# EAGLE board Compute v0.5 (EAGLE 7.3.2), part 1 of 2
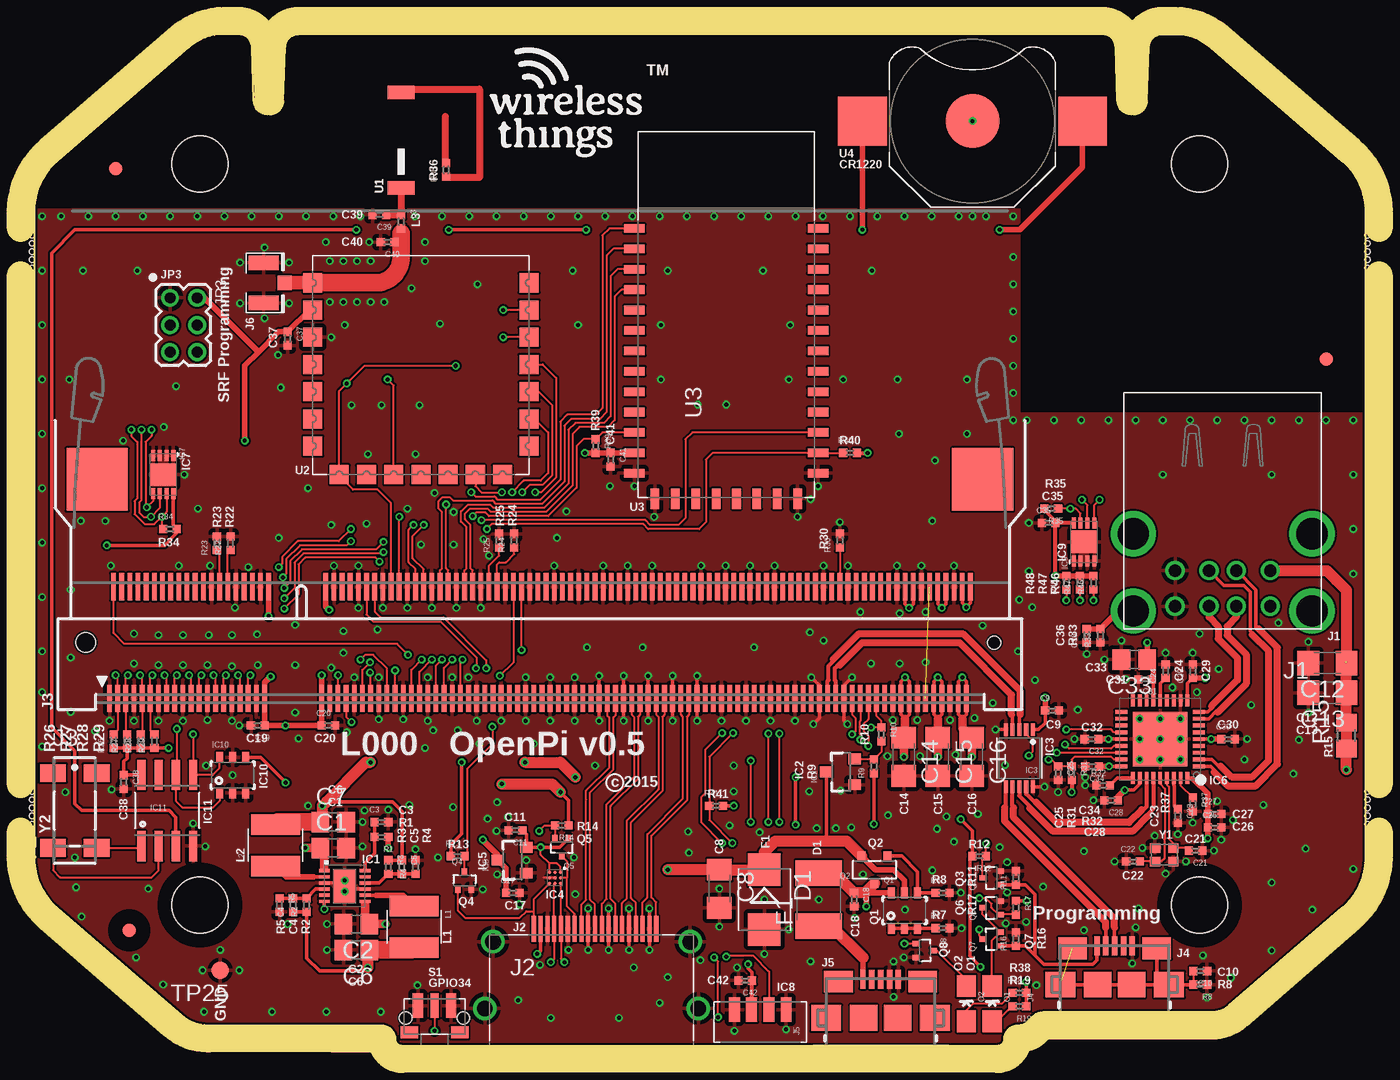
[diagram p0: board, top side]
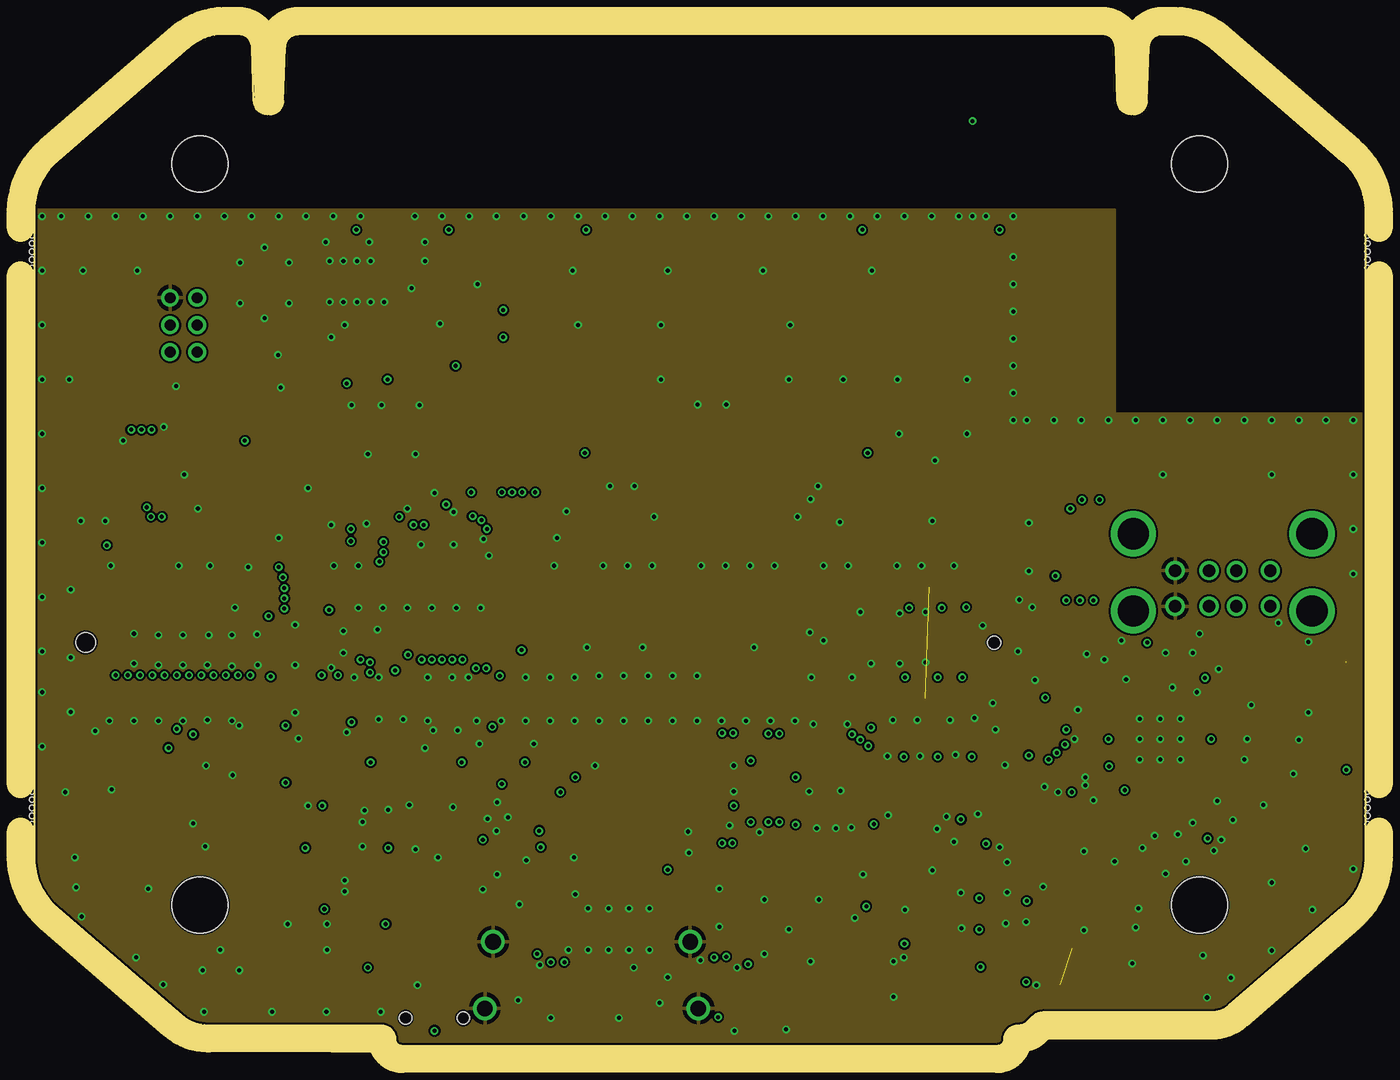
[diagram p1: board, inner layer Route2]
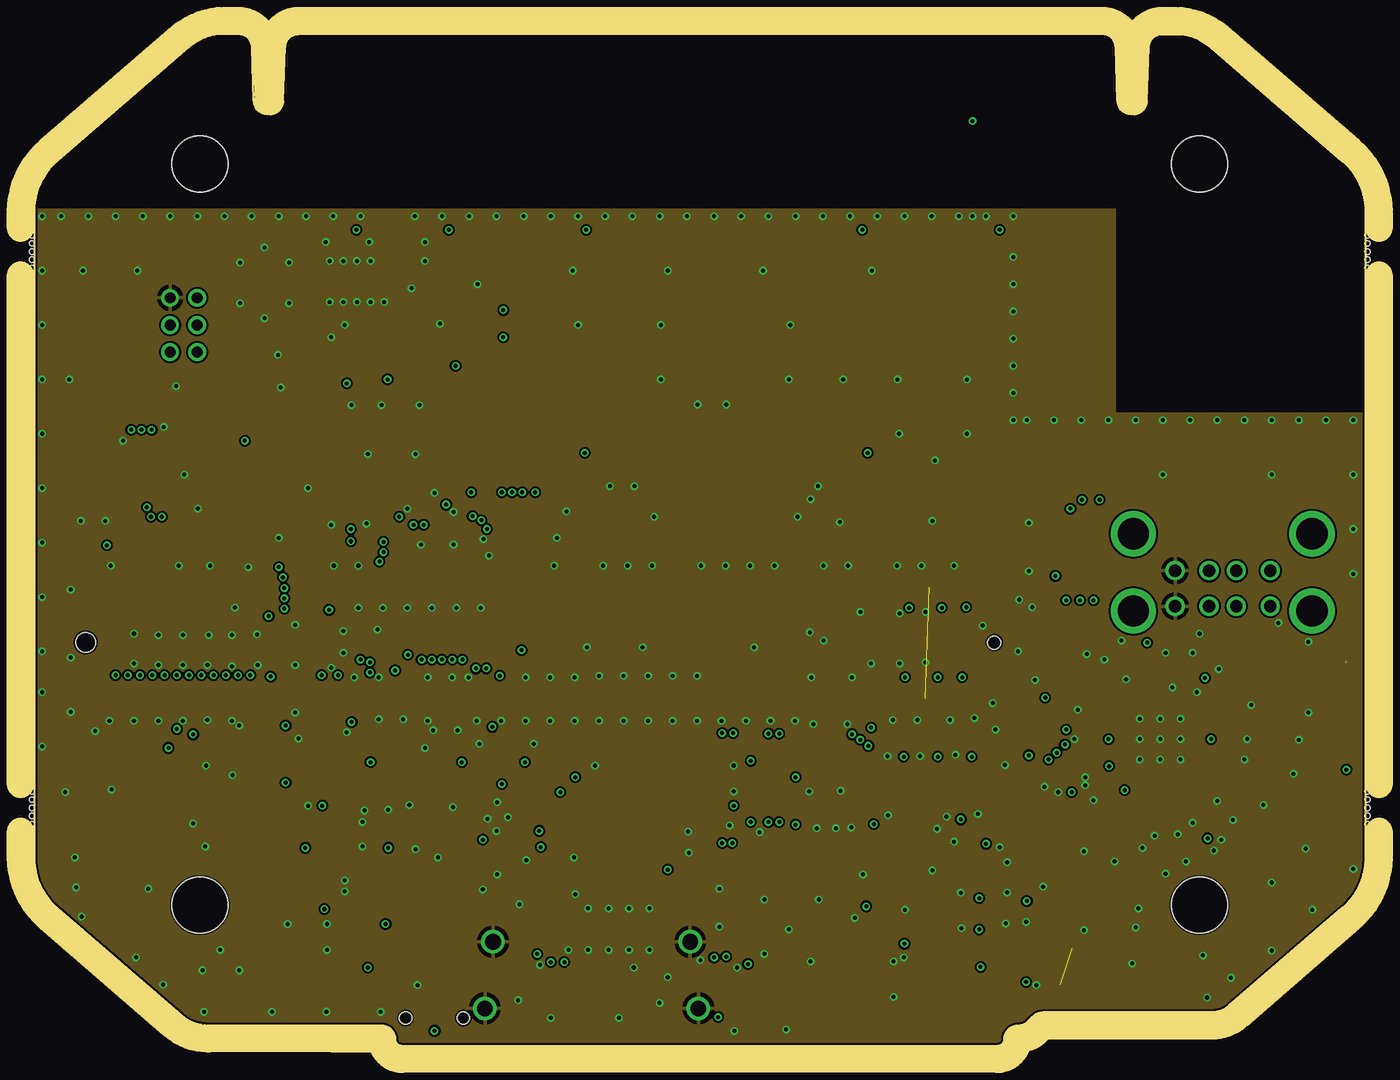
[diagram p2: board, inner layer Route15]
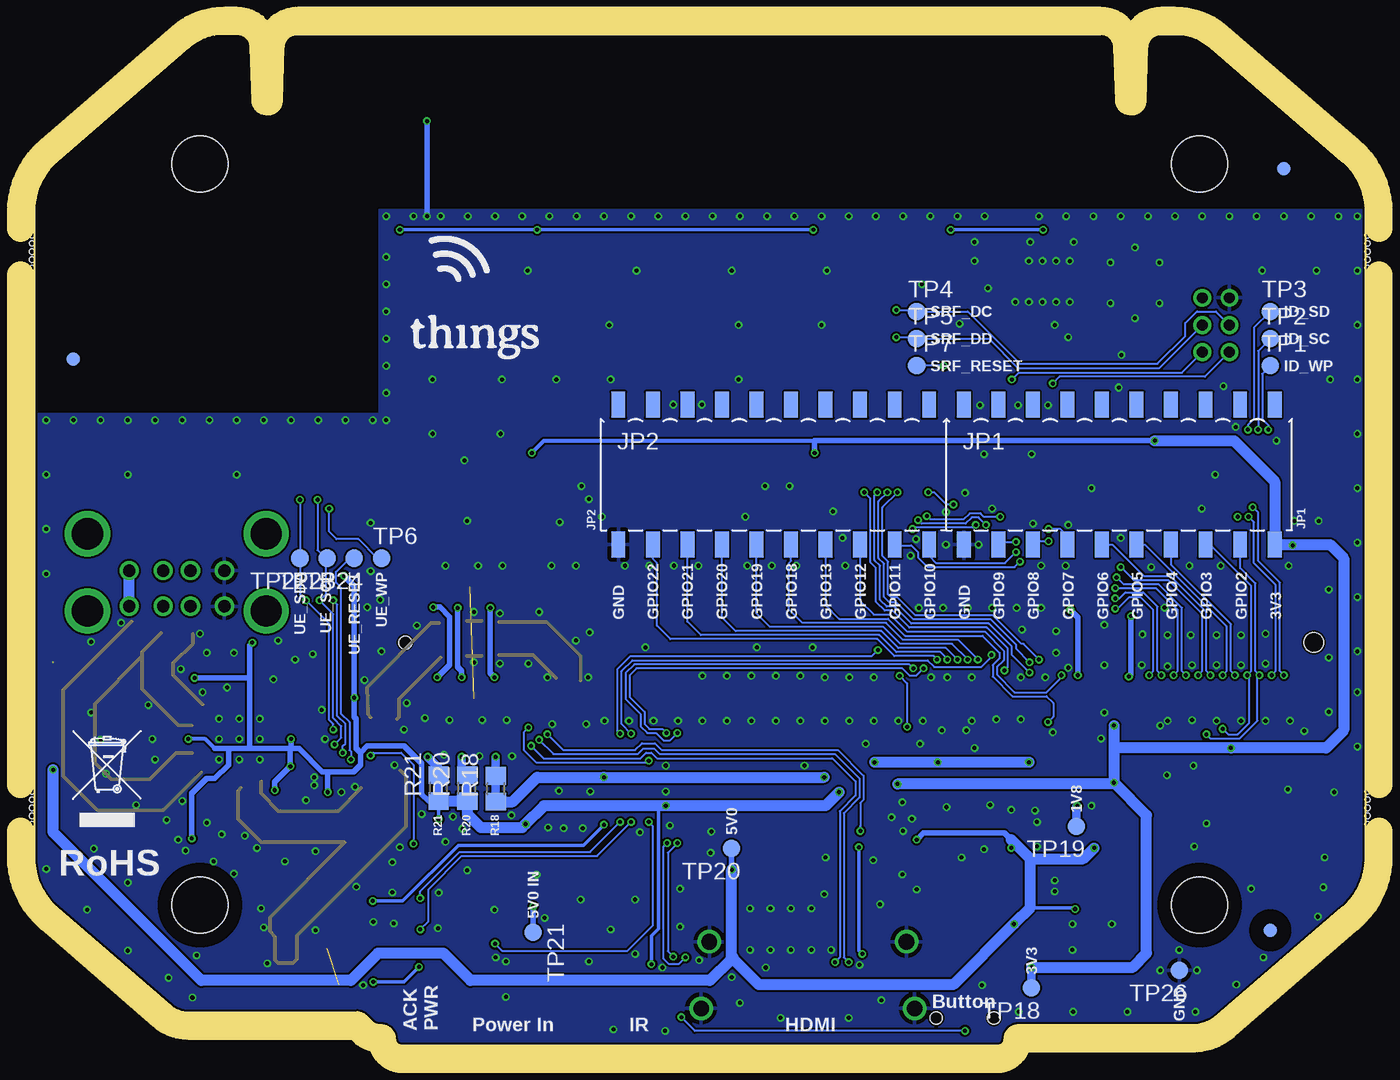
[diagram p3: board, bottom side, seen from below]

Size 97.9 x 74.4 mm. Coordinates in mm from the lower left corner, seen from the top.
Copper layers (1+2*15+16): Top 0.035mm / dielectric 0.17mm / Route2 0.018mm / dielectric 47mil / Route15 0.018mm / dielectric 0.17mm / Bottom 0.035mm
Design rules "little015mm  Round *": minimum track width 0.15mm, minimum drill 0.3mm, track to track 0.15mm, track to pad 0.15mm, pad to pad 0.15mm, via to via 0.15mm, smd to smd 0.15mm, copper to edge 0.15mm, drill to drill 0.15mm, minimum pad ring 10mil, minimum via ring 5mil, stop-mask expansion 4mil, vias tented up to drill 0.6mm, thermal gap 12mil
Net classes: 0 default: width 0.15 mm, drill 0.3 mm; 1 ANT: width 1.27 mm, drill 0.4 mm, clearance 0.4 mm; 2 90R: width 0.5 mm, drill 0.3 mm, clearance 0.7 mm to class 0, clearance 0.1 mm; 3 100R: width 0.15 mm, drill 0.3 mm, clearance 0.6 mm to class 2, clearance 0.4 mm; 4 5V0: width 0.406 mm, drill 0.3 mm, clearance 0.6 mm to class 2, clearance 0.6 mm to class 3; 5 3V3: width 0.254 mm, drill 0.3 mm, clearance 0.6 mm to class 2, clearance 0.6 mm to class 3; 6 1V8: width 0.254 mm, drill 0.3 mm, clearance 0.6 mm to class 2, clearance 0.6 mm to class 3; 7 H5V0: width 0.254 mm, drill 0.3 mm, clearance 0.6 mm to class 2, clearance 0.6 mm to class 3; 8 MAINS: clearance 4 mm to class 0, clearance 4 mm to class 1, clearance 4 mm to class 2, clearance 4 mm to class 3, clearance 4 mm to class 4, clearance 4 mm to class 5, clearance 4 mm to class 6, clearance 4 mm to class 7, clearance 4 mm
tRestrict: area 37.3,63.9 to 39.4,65.5
Milling: 1 lines

## Footprints (pad centres in the part's own frame; a part is rotated, then mirrored left to right if it is on the bottom)
C0805 = smd 1.3 x 1.5: 1 -0.95,0; 2 0.95,0
C0402-SMALLER = smd 0.6 x 0.6: 1 -0.5,0; 2 0.5,0
C1206 = smd 1.6 x 1.8: 1 -1.4,0; 2 1.4,0
SMB = smd 2.4 x 2.4: A 2.2,0; C -2.2,0
L1812 = smd 1.9 x 3.4: 1 -1.95,0; 2 1.95,0
FIDUCIAL-1X2.5-STOP = smd 1 x 1: 1 0,0
WDFB-12L = smd 0.25 x 0.8: 1 -1.125,-1.5; 2 -0.675,-1.5; 3 -0.225,-1.5; 4 0.225,-1.5; 5 0.675,-1.5; 6 1.125,-1.5; 7 1.125,1.5; 8 0.675,1.5; 9 0.225,1.5; 10 -0.225,1.5; 11 -0.675,1.5; 12 -1.125,1.5 | smd 2.5 x 1.7: PAD 0,0
SOT23-3 = smd 0.9 x 0.8: 1 1,-0.95; 2 1,0.95; 3 -1.1,0
MSOP-10 = smd 0.3 x 0.9: 1 -1,-2.1; 2 -0.5,-2.1; 3 0,-2.1; 4 0.5,-2.1; 5 1,-2.1; 6 1,2.1; 7 0.5,2.1; 8 0,2.1; 9 -0.5,2.1; 10 -1,2.1
WLSCP9 = smd 0.25 x 0.25: A1 -0.4,0.4; A2 0,0.4; A3 0.4,0.4; B1 -0.4,0; B2 0,0; B3 0.4,0; C1 -0.4,-0.4; C2 0,-0.4; C3 0.4,-0.4
QFN36-CENTRE-MASK = smd 0.28 x 0.9: 1 -2,-2.85; 2 -1.5,-2.85; 3 -1,-2.85; 4 -0.5,-2.85; 5 0,-2.85; 6 0.5,-2.85; 7 1,-2.85; 8 1.5,-2.85; 9 2,-2.85; 19 2,2.85; 20 1.5,2.85; 21 1,2.85; 22 0.5,2.85; 23 0,2.85; 24 -0.5,2.85; 25 -1,2.85; 26 -1.5,2.85; 27 -2,2.85 | smd 0.9 x 0.28: 10 2.85,-2; 11 2.85,-1.5; 12 2.85,-1; 13 2.85,-0.5; 14 2.85,0; 15 2.85,0.5; 16 2.85,1; 17 2.85,1.5; 18 2.85,2; 28 -2.85,2; 29 -2.85,1.5; 30 -2.85,1; 31 -2.85,0.5; 32 -2.85,0; 33 -2.85,-0.5; 34 -2.85,-1; 35 -2.85,-1.5; 36 -2.85,-2 | smd 4 x 4: PAD 0,0
TDFN-8 = smd 0.8 x 0.3: 1 -1.4,0.75; 2 -1.4,0.25; 3 -1.4,-0.25; 4 -1.4,-0.75; 5 1.4,-0.75; 6 1.4,-0.25; 7 1.4,0.25; 8 1.4,0.75 | smd 1.65 x 1.88: EP 0,0
TSOP75X = smd 0.8 x 1.8: 1 -1.905,-0.9; 2 -0.635,-0.9; 3 0.635,-0.9; 4 1.905,-0.9
SOT-23-6 = smd 0.51 x 0.8: 1 -0.95,-1.3; 2 0,-1.3; 3 0.95,-1.3; 4 0.95,1.3; 5 0,1.3; 6 -0.95,1.3
SO08 = smd 0.61 x 2.21: 1 -1.905,-2.616; 2 -0.635,-2.616; 3 0.635,-2.616; 4 1.905,-2.616; 5 1.905,2.616; 6 0.635,2.616; 7 -0.635,2.616; 8 -1.905,2.616
61400826021 = drill 2.3: 5 -6.57,5.68; 6 -6.57,0; 7 6.57,0; 8 6.57,5.68 | drill 0.9: A1 -3.5,5.33; A2 -1,5.33; A3 1,5.33; A4 3.5,5.33; B1 -3.5,2.71; B2 -1,2.71; B3 1,2.71; B4 3.5,2.71
10029449-001RLF = smd 0.3 x 1.9: 1 4.75,8.45; 2 4.25,8.45; 3 3.75,8.45; 4 3.25,8.45; 5 2.75,8.45; 6 2.25,8.45; 7 1.75,8.45; 8 1.25,8.45; 9 0.75,8.45; 10 0.25,8.45; 11 -0.25,8.45; 12 -0.75,8.45; 13 -1.25,8.45; 14 -1.75,8.45; 15 -2.25,8.45; 16 -2.75,8.45; 17 -3.25,8.45; 18 -3.75,8.45; 19 -4.25,8.45 | drill 1.15: GND@S1 -7.25,7.5; GND@S2 7.25,7.5; GND@S3 -7.85,2.6; GND@S4 7.85,2.6
1-1376408-4 = smd 0.35 x 2: 1 -32.65,-4.1; 2 -32.35,4.1; 3 -32.05,-4.1; 4 -31.75,4.1; 5 -31.45,-4.1; 6 -31.15,4.1; 7 -30.85,-4.1; 8 -30.55,4.1; 9 -30.25,-4.1; 10 -29.95,4.1; 11 -29.65,-4.1; 12 -29.35,4.1; 13 -29.05,-4.1; 14 -28.75,4.1; 15 -28.45,-4.1; 16 -28.15,4.1; 17 -27.85,-4.1; 18 -27.55,4.1; 19 -27.25,-4.1; 20 -26.95,4.1; 21 -26.65,-4.1; 22 -26.35,4.1; 23 -26.05,-4.1; 24 -25.75,4.1; 25 -25.45,-4.1; 26 -25.15,4.1; 27 -24.85,-4.1; 28 -24.55,4.1; 29 -24.25,-4.1; 30 -23.95,4.1; 31 -23.65,-4.1; 32 -23.35,4.1; 33 -23.05,-4.1; 34 -22.75,4.1; 35 -22.45,-4.1; 36 -22.15,4.1; 37 -21.85,-4.1; 38 -21.55,4.1; 39 -21.25,-4.1; 40 -20.95,4.1; 41 -17.05,-4.1; 42 -16.75,4.1; 43 -16.45,-4.1; 44 -16.15,4.1; 45 -15.85,-4.1; 46 -15.55,4.1; 47 -15.25,-4.1; 48 -14.95,4.1; 49 -14.65,-4.1; 50 -14.35,4.1; 51 -14.05,-4.1; 52 -13.75,4.1; 53 -13.45,-4.1; 54 -13.15,4.1; 55 -12.85,-4.1; 56 -12.55,4.1; 57 -12.25,-4.1; 58 -11.95,4.1; 59 -11.65,-4.1; 60 -11.35,4.1; 61 -11.05,-4.1; 62 -10.75,4.1; 63 -10.45,-4.1; 64 -10.15,4.1; 65 -9.85,-4.1; 66 -9.55,4.1; 67 -9.25,-4.1; 68 -8.95,4.1; 69 -8.65,-4.1; 70 -8.35,4.1; 71 -8.05,-4.1; 72 -7.75,4.1; 73 -7.45,-4.1; 74 -7.15,4.1; 75 -6.85,-4.1; 76 -6.55,4.1; 77 -6.25,-4.1; 78 -5.95,4.1; 79 -5.65,-4.1; 80 -5.35,4.1; 81 -5.05,-4.1; 82 -4.75,4.1; 83 -4.45,-4.1; 84 -4.15,4.1; 85 -3.85,-4.1; 86 -3.55,4.1; 87 -3.25,-4.1; 88 -2.95,4.1; 89 -2.65,-4.1; 90 -2.35,4.1; 91 -2.05,-4.1; 92 -1.75,4.1; 93 -1.45,-4.1; 94 -1.15,4.1; 95 -0.85,-4.1; 96 -0.55,4.1; 97 -0.25,-4.1; 98 0.05,4.1; 99 0.35,-4.1; 100 0.65,4.1; 101 0.95,-4.1; 102 1.25,4.1; 103 1.55,-4.1; 104 1.85,4.1; 105 2.15,-4.1; 106 2.45,4.1; 107 2.75,-4.1; 108 3.05,4.1; 109 3.35,-4.1; 110 3.65,4.1; 111 3.95,-4.1; 112 4.25,4.1; 113 4.55,-4.1; 114 4.85,4.1; 115 5.15,-4.1; 116 5.45,4.1; 117 5.75,-4.1; 118 6.05,4.1; 119 6.35,-4.1; 120 6.65,4.1; 121 6.95,-4.1; 122 7.25,4.1; 123 7.55,-4.1; 124 7.85,4.1; 125 8.15,-4.1; 126 8.45,4.1; 127 8.75,-4.1; 128 9.05,4.1; 129 9.35,-4.1; 130 9.65,4.1; 131 9.95,-4.1; 132 10.25,4.1; 133 10.55,-4.1; 134 10.85,4.1; 135 11.15,-4.1; 136 11.45,4.1; 137 11.75,-4.1; 138 12.05,4.1; 139 12.35,-4.1; 140 12.65,4.1; 141 12.95,-4.1; 142 13.25,4.1; 143 13.55,-4.1; 144 13.85,4.1; 145 14.15,-4.1; 146 14.45,4.1; 147 14.75,-4.1; 148 15.05,4.1; 149 15.35,-4.1; 150 15.65,4.1; 151 15.95,-4.1; 152 16.25,4.1; 153 16.55,-4.1; 154 16.85,4.1; 155 17.15,-4.1; 156 17.45,4.1; 157 17.75,-4.1; 158 18.05,4.1; 159 18.35,-4.1; 160 18.65,4.1; 161 18.95,-4.1; 162 19.25,4.1; 163 19.55,-4.1; 164 19.85,4.1; 165 20.15,-4.1; 166 20.45,4.1; 167 20.75,-4.1; 168 21.05,4.1; 169 21.35,-4.1; 170 21.65,4.1; 171 21.95,-4.1; 172 22.25,4.1; 173 22.55,-4.1; 174 22.85,4.1; 175 23.15,-4.1; 176 23.45,4.1; 177 23.75,-4.1; 178 24.05,4.1; 179 24.35,-4.1; 180 24.65,4.1; 181 24.95,-4.1; 182 25.25,4.1; 183 25.55,-4.1; 184 25.85,4.1; 185 26.15,-4.1; 186 26.45,4.1; 187 26.75,-4.1; 188 27.05,4.1; 189 27.35,-4.1; 190 27.65,4.1; 191 27.95,-4.1; 192 28.25,4.1; 193 28.55,-4.1; 194 28.85,4.1; 195 29.15,-4.1; 196 29.45,4.1; 197 29.75,-4.1; 198 30.05,4.1; 199 30.35,-4.1; 200 30.65,4.1 | smd 4.5 x 4.6: M1 -33.55,12; M2 31.55,12 | hole 1.45: -34.4,0 | hole 0.95: 32.4,0
USB-AB-MICRO-SMD_LWK = smd 1.4 x 0.4: D+ 2.85,0; D- 2.85,0.65; GND 2.85,-1.3; ID 2.85,-0.65; VBUS 2.85,1.3 | smd 1.6 x 2.1: SHIELD 2.675,3.1; SHIELD@5 2.675,-3.1 | smd 1.9 x 2: SHIELD@0 0,1.25; SHIELD@1 0,-1.25 | smd 1.9 x 2.2: SHIELD@2 0,-4; SHIELD@3 0,4
U.FL = smd 2.2 x 1.05: P$1 0,-1.475; P$2 0,1.475 | smd 1.05 x 1.05: P$3 -1.525,0
1X10_SSM = smd 1.02 x 1.905: 1 0,-5.143; 2 2.54,-5.143; 3 5.08,-5.143; 4 7.62,-5.143; 5 10.16,-5.143; 6 12.7,-5.143; 7 15.24,-5.143; 8 17.78,-5.143; 9 20.32,-5.143; 10 22.86,-5.143; 11 0,5.143; 12 2.54,5.143; 13 5.08,5.143; 14 7.62,5.143; 15 10.16,5.143; 16 12.7,5.143; 17 15.24,5.143; 18 17.78,5.143; 19 20.32,5.143; 20 22.86,5.143
2X3_2MM = drill 0.8: 1 -2,-1; 2 -2,1; 3 0,-1; 4 0,1; 5 2,-1; 6 2,1
SRN4018 = smd 1.5 x 3.6: 1 -1.525,0; 2 1.525,0
LED-0805-1206 = smd 1.6 x 1.4: A 1.3,0; C -1.3,0
THINGS-BOX-MEDIUM-MIDDLE-COMPUTE-0.4 = hole 4.1: 85.7,8.85; 85.7,63.35; 12.2,63.35; 12.2,8.85 | hole 0.4: -0.15,14.8; -0.15,15.4; -0.15,16; -0.15,16.6; -0.15,17.2; 98.05,17.2; 98.05,16.6; 98.05,16; 98.05,15.4; 98.05,14.8; -0.15,55.7; -0.15,56.3; -0.15,56.9; -0.15,57.5; -0.15,58.1; 98.05,58.1; 98.05,57.5; 98.05,56.9; 98.05,56.3; 98.05,55.7
SOT23-R = smd 0.6 x 0.7: 1 -0.95,-1; 2 0.95,-1; 3 0,1
SOT523 = smd 0.4 x 0.51: 1 -0.5,-0.65; 2 0.5,-0.65; 3 0,0.65
R0402-SMALLER = smd 0.6 x 0.6: 1 -0.5,0; 2 0.5,0
R0805 = smd 1.3 x 1.5: 1 -0.95,0; 2 0.95,0
SKRTLAE010 = smd 0.75 x 1.8: 1 1.225,-0.9; 3 -1.225,-0.9 | smd 0.6 x 1.8: 2 0,-0.9 | smd 1.3 x 0.9: PAD@1 1.85,1.05; PAD@2 -1.85,1.05 | hole 0.9: 2.125,0; -2.125,0
B1,27 = smd 1.27 x 1.27: TP 0,0
JTICHIPANT-ROT = smd 1 x 2: FEED -3.51,0; NC 3.51,0
SRF-LANDING-NO-ANT-1.2 = smd 1.4 x 1.4: 1 15.9,2; 2 15.9,4; 3 15.9,6; 4 15.9,8; 5 15.9,10; 6 15.9,12; 7 15.9,14; 8 0,14; 9 0,12; 10 0,10; 11 0,8; 12 0,6; 13 0,4; 14 0,2; 15 1.95,-0.1; 16 3.95,-0.1; 17 5.95,-0.1; 18 7.95,-0.1; 19 9.95,-0.1; 20 11.95,-0.1; 21 13.95,-0.1
26.9X13X2.2_BOARD = smd 1.5 x 0.635: 1 -6.75,6; 2 -6.75,4.5; 3 -6.75,3; 4 -6.75,1.5; 5 -6.75,0; 6 -6.75,-1.5; 7 -6.75,-3; 8 -6.75,-4.5; 9 -6.75,-6; 10 -6.75,-7.5; 11 -6.75,-9; 12 -6.75,-10.5; 13 -6.75,-12; 22 6.75,-12; 23 6.75,-10.5; 24 6.75,-9; 25 6.75,-7.5; 26 6.75,-6; 27 6.75,-4.5; 28 6.75,-3; 29 6.75,-1.5; 30 6.75,0; 31 6.75,1.5; 32 6.75,3; 33 6.75,4.5; 34 6.75,6 | smd 0.635 x 1.5: 14 -5.25,-13.875; 15 -3.75,-13.875; 16 -2.25,-13.875; 17 -0.75,-13.875; 18 0.75,-13.875; 19 2.25,-13.875; 20 3.75,-13.875; 21 5.25,-13.875
BATTCON_12MM-BK-885-ROUND = smd 3.962 x 3.962: GND 0,0 | smd 3.6 x 3.6: PWR@1 -8.1,0; PWR@2 8.1,0
2X1.6XTAL-CENTRE = smd 0.75 x 0.7: P$1 -0.675,0.5; P$2 -0.675,-0.5; P$3 0.675,-0.5; P$4 0.675,0.5
MC-306 = smd 1.3 x 1.9: 1 -2.75,-1.6; 2 2.75,-1.6; 3 2.75,1.6; 4 -2.75,1.6

## Placement (x,y rotation side)
C1  0805 10uF  [C0805]  22,14.55 0 top
C2  0805 10uF  [C0805]  23.7,8.95 180 top
C3  0402 100nF  [C0402-SMALLER]  25.55,16.45 0 top
C4  0402 NP/100pF  [C0402-SMALLER]  19.05,10.35 90 top
C5  0402 NP/100pF  [C0402-SMALLER]  27.05,13.15 270 top
C6  0805 10uF  [C0805]  23.7,7.05 180 top
C7  0805 10uF  [C0805]  22,16.45 0 top
C8  1206 47uF  [C1206]  50.4,11.55 270 top
C9  0402 100nF  [C0402-SMALLER]  74.85,24.65 0 top
C10  0402 100nF (NP)  [C0402-SMALLER]  85.75,5.5 180 top
C11  0402 100nF  [C0402-SMALLER]  35.4,15.85 180 top
C12  1206 47uF  [C1206]  95.1,28.15 180 top
C13  1206 47uF  [C1206]  95.1,25.95 180 top
C14  1206 47uF  [C1206]  63.95,21.25 270 top
C15  1206 47uF  [C1206]  66.45,21.25 270 top
C16  1206 47uF  [C1206]  68.95,21.25 270 top
C17  0402 100nF  [C0402-SMALLER]  35.2,11.25 0 top
C18  0402 1uF  [C0402-SMALLER]  60.3,10.75 270 top
C19  0402 1uF  [C0402-SMALLER]  16.45,23.55 180 top
C20  0402 1uF  [C0402-SMALLER]  21.65,23.55 0 top
C21  0402 6pF  [C0402-SMALLER]  85.4,14.35 180 top
C22  0402 6pF  [C0402-SMALLER]  80.8,13.55 0 top
C23  0402 1uF  [C0402-SMALLER]  84.1,16.9 270 top
C24  0402 1uF  [C0402-SMALLER]  83.2,27.55 90 top
C25  0402 100nF  [C0402-SMALLER]  75.3,20.05 270 top
C26  0402 1uF  [C0402-SMALLER]  86.8,16.05 0 top
C27  0402 100nF  [C0402-SMALLER]  86.8,17.05 0 top
C28  0402 100nF  [C0402-SMALLER]  79.2,18.05 180 top
C29  0402 100nF  [C0402-SMALLER]  85.2,27.55 90 top
C30  0402 100nF  [C0402-SMALLER]  87.8,22.55 0 top
C31  0402 100nF  [C0402-SMALLER]  81.7,26.95 180 top
C32  0402 100nF  [C0402-SMALLER]  77.75,22.55 180 top
C33  0805 4.7uF  [C0805]  80.9,28.4 180 top
C34  0402 1nF (NP)  [C0402-SMALLER]  77.8,20.55 180 top
C35  0402 100nF  [C0402-SMALLER]  74.6,38.45 0 top
C36  0402 100nF  [C0402-SMALLER]  77.4,30.15 90 top
C37  0402 100nF  [C0402-SMALLER]  18.65,52 270 top
C38  0402 100nF  [C0402-SMALLER]  6.6,19.4 270 top
C39  0402 ?? (NP)  [C0402-SMALLER]  25.4,61.1 180 top
C40  0402 ??  [C0402-SMALLER]  26,59.1 180 top
C41  0402 100nF  [C0402-SMALLER]  42.4,43.1 270 top
C42  0402 100nF  [C0402-SMALLER]  52.3,4.8 180 top
D1  SMBJ5.0A  [SMB]  53.7,10.75 270 top
F1  MF-MSMF200  [L1812]  57.7,10.75 90 top
FID1  FIDUCIAL1X2.5-STOP  [FIDUCIAL-1X2.5-STOP]  6,64.5 180 top
FID2  FIDUCIAL1X2.5-STOP  [FIDUCIAL-1X2.5-STOP]  7,8.5 180 top
FID3  FIDUCIAL1X2.5-STOP  [FIDUCIAL-1X2.5-STOP]  95,50.5 180 top
FID4  FIDUCIAL1X2.5-STOP  [FIDUCIAL-1X2.5-STOP]  6,64.5 180 bottom
FID5  FIDUCIAL1X2.5-STOP  [FIDUCIAL-1X2.5-STOP]  7,8.5 180 bottom
FID6  FIDUCIAL1X2.5-STOP  [FIDUCIAL-1X2.5-STOP]  95,50.5 180 bottom
IC1  PAM2306AYPKE/PAM2306AYPAA  [WDFB-12L]  22.85,11.75 270 top
IC2  APX803-46SA  [SOT23-3]  59.35,20.15 0 top
IC3  FSUSB42MUX  [MSOP-10]  72.45,21.15 180 top
IC4  ESD5384  [WLSCP9]  38.3,12.35 270 top
IC5  AP2331SA  [SOT23-3]  35.2,13.65 0 top
IC6  USB2514B  [QFN36-CENTRE-MASK]  82.8,22.55 90 top
IC7  CAT24C32VP2I  [TDFN-8]  9.5,42 270 top
IC8  TSOP75438WTR  [TSOP75X]  53.4,1.75 180 top
IC9  CAT24C02VP2I  [TDFN-8]  77.2,37.05 90 top
IC10  TMP100NA  [SOT-23-6]  14.6,19.9 0 top
IC11  BQ32000  [SO08]  9.8,17.3 0 top
J1  1903815-1  [61400826021]  87.4,37.65 180 top
J2  HDMI-10029449-001RLF  [10029449-001RLF]  41,0.15 0 top
J3  1473005-4  [1-1376408-4]  38.2,29.65 0 top
J4  ZX62-AB-5PA(11)  [USB-AB-MICRO-SMD_LWK]  79.45,4.5 90 top
J5  ZX62-AB-5PA(11)  [USB-AB-MICRO-SMD_LWK]  62.25,2.05 90 top
J6  U.FL (NP)  [U.FL]  16.9,56.1 180 top
JP1  M10_SSM  [1X10_SSM]  29.54,42 0 bottom
JP2  M10_SSM  [1X10_SSM]  54.94,42 0 bottom
JP3  M03X2-2MM  [2X3_2MM]  11,53 270 top
L1  SRN4018-4R7M  [SRN4018]  27.95,8.75 270 top
L2  SRN4018-4R7M  [SRN4018]  17.75,14.75 90 top
L3  0402 ??  [C0402-SMALLER]  27,60.6 270 top
LOGO1  WIRELESS-THINGS-2.15MM-GOLD  [WIRELESS-THINGS-2.15MM-GOLD]  71,50.5 0 bottom
LOGO2  WIRELESS-THINGS-1.9MM  [WIRELESS-THINGS-1.9MM]  33.5,65.35 0 top
O1  0805 Red  [LED-0805-1206]  70.45,3.1 270 top
O2  0805 Green  [LED-0805-1206]  68.55,3.1 270 top
OUTLINE1  THIGNS-BOX-MIDDLE-COMPUTE-0.4  [THINGS-BOX-MEDIUM-MIDDLE-COMPUTE-0.4]  0,1.5 0 top
Q1  DMMT5401  [SOT-23-6]  64,9.95 0 top
Q2  DMG2305UX  [SOT23-R]  61.8,12.95 180 top
Q3  DMG1012T  [SOT523]  70.4,12.35 90 top
Q4  DMG1012T  [SOT523]  31.65,12.15 0 top
Q5  DMG1012T  [SOT523]  38.8,14.6 180 top
Q6  DMG1012T  [SOT523]  70.4,10.15 90 top
Q7  DMG1012T  [SOT523]  70.4,7.85 90 top
Q8  DMG1012T  [SOT523]  65.5,7 270 top
R1  0402 100k  [R0402-SMALLER]  25.55,15.35 180 top
R2  0402 0R/536K  [R0402-SMALLER]  20.05,10.35 90 top
R3  0402 0R/200k  [R0402-SMALLER]  26.05,13.15 270 top
R4  0402 NP/100K  [R0402-SMALLER]  28.05,13.15 90 top
R5  0402 NP/120K  [R0402-SMALLER]  18.05,10.35 270 top
R6  0402 47K  [R0402-SMALLER]  66.8,11.25 0 top
R7  0402 47K  [R0402-SMALLER]  66.8,8.65 0 top
R8  0402 330R (NP)  [R0402-SMALLER]  85.75,4.5 180 top
R9  0402 10K  [R0402-SMALLER]  61.75,20.55 90 top
R10  0402 470R  [R0402-SMALLER]  62.3,22.9 270 top
R11  0402 47K  [R0402-SMALLER]  72.2,12.35 90 top
R12  0402 47K  [R0402-SMALLER]  69.5,13.95 180 top
R13  0402 100k  [R0402-SMALLER]  31.15,13.95 0 top
R14  0402 100k  [R0402-SMALLER]  38.8,16.2 180 top
R15  0805 0R (NP)  [R0805]  96.5,22.8 90 top
R16  0402 47K  [R0402-SMALLER]  72.2,7.85 90 top
R17  0402 47K  [R0402-SMALLER]  72.2,10.15 270 top
R18  0805 0R (NP)  [R0805]  63.95,18.9 90 bottom
R19  0402 470R  [R0402-SMALLER]  72.45,2.9 180 top
R20  0805 0R (NP)  [R0805]  66.05,18.95 90 bottom
R21  0805 0R (NP)  [R0805]  68.15,18.95 90 bottom
R22  0402 100k  [R0402-SMALLER]  14.45,36.95 90 top
R23  0402 100k  [R0402-SMALLER]  13.45,36.95 90 top
R24  0402 100k  [R0402-SMALLER]  35.3,37.15 90 top
R25  0402 100k  [R0402-SMALLER]  34.2,37.15 90 top
R26  0402 3K9  [R0402-SMALLER]  5.85,22.4 90 top
R27  0402 3K9  [R0402-SMALLER]  6.85,22.4 90 top
R28  0402 1K8  [R0402-SMALLER]  7.85,22.4 90 top
R29  0402 1K8  [R0402-SMALLER]  8.85,22.4 90 top
R30  0402 1K8  [R0402-SMALLER]  59.25,37.15 90 top
R31  0402 100k  [R0402-SMALLER]  76.3,20.05 270 top
R32  0402 100k  [R0402-SMALLER]  78.6,19.15 0 top
R33  0402 330R  [R0402-SMALLER]  78.4,30.15 90 top
R34  0402 1k  [R0402-SMALLER]  10,38 0 top
R35  0402 1k  [R0402-SMALLER]  74.8,39.5 180 top
R36  0402 0R  [R0402-SMALLER]  30.3,64.4 90 top
R37  0402 12k  [R0402-SMALLER]  85.2,17.75 270 top
R38  0402 470R  [R0402-SMALLER]  72.45,3.9 0 top
R39  0402 1k  [R0402-SMALLER]  41.3,44.1 270 top
R40  0402 1k  [R0402-SMALLER]  60,43.6 0 top
R41  0402 10k  [R0402-SMALLER]  50.15,17.65 0 top
R46  0402 10k  [R0402-SMALLER]  77.9,34.05 90 top
R47  0402 10k  [R0402-SMALLER]  76.9,34.05 90 top
R48  0402 10k  [R0402-SMALLER]  75.9,34.05 90 top
S1  TAC_SWITCH1-SKRTLAE010  [SKRTLAE010]  29.45,2.05 180 top
TP1  ID_WP (NP)  [B1,27]  7,50 0 bottom
TP2  ID_SC (NP)  [B1,27]  7,52 0 bottom
TP3  ID_SD (NP)  [B1,27]  7,54 0 bottom
TP4  SRF_DC (NP)  [B1,27]  33,54 0 bottom
TP5  SRF_DD (NP)  [B1,27]  33,52 0 bottom
TP6  USB_WP (NP)  [B1,27]  72.35,35.85 0 bottom
TP7  SRF_!RESET (NP)  [B1,27]  33,50 0 bottom
TP18  3V3 (NP)  [B1,27]  24.55,4.25 180 bottom
TP19  1V8 (NP)  [B1,27]  21.25,16.15 180 bottom
TP20  5V0 (NP)  [B1,27]  46.6,14.5 180 bottom
TP21  5V0 In (NP)  [B1,27]  61.2,8.35 270 bottom
TP22  USB_SDA (NP)  [B1,27]  78.35,35.85 180 bottom
TP23  USB_SCL (NP)  [B1,27]  76.35,35.85 180 bottom
TP24  USB_!RESET (NP)  [B1,27]  74.35,35.85 180 bottom
TP25  GND (NP)  [B1,27]  13.7,5.55 180 top
TP26  GND (NP)  [B1,27]  13.7,5.55 180 bottom
U1  JTICHIPANT  [JTICHIPANT-ROT]  27,66.6 90 top
U2  SRF  [SRF-LANDING-NO-ANT-1.2]  20.5,42.1 0 top
U3  HM-10  [26.9X13X2.2_BOARD]  50.9,54.1 0 top
U4  CLIP 1220  [BATTCON_12MM-BK-885-ROUND]  69,68 0 top
U$3  [WEEE-LOGO]  95.1,16.1 0 bottom
Y1  XTAL 24MHz  [2X1.6XTAL-CENTRE]  83.1,14.05 180 top
Y2  XTAL 3.762kHz  [MC-306]  3,17.3 90 top

## Library data of the parts
C1-C42 D1 F1 FID1-FID6 IC1-IC5 IC7 IC9 IC10 J2 J6 JP1-JP3 L1-L3 O1 O2 Q1 R1-R41 R46-R48 S1 TP1-TP7 TP18-TP26 U1 U4 U$3 Y1 Y2 = CISECO eaglecad designs
IC6 J3 = Ciseco Pi Compute Module
IC8 J4 J5 Q2-Q8 = TiLDA Mk2 Parts
IC11 = SparkFunJan12
J1 = CommunicationConnectors
LOGO1 LOGO2 = Things Logos
OUTLINE1 = Things Box
U2 = Ciseco Footprints
U3 = JNHuaMao

## Nets
1V8 [1V8]: C5.1 C7.1 L2.2 R3.1 R13.1 R17.1 R18.1 TP19.TP
3V3 [3V3]: C4.1 C6.1 C9.1 C19.1 C20.1 C26.1 C27.1 C28.1 C29.1 C30.1 C31.1 C32.1 C33.1 C34.1 C35.2 C37.1 C38.1 C41.1 C42.1 IC3.1 IC6.5 IC6.10 IC6.15 IC6.23 IC6.27 IC6.29 IC6.36 IC7.8 IC8.3 IC9.8 IC10.4 IC11.8 J3.39 J3.40 J3.41 J3.42 JP1.10 JP3.2 L1.2 R2.1 R9.1 R12.2 R14.1 R19.1 R20.1 R21.1 R26.1 R27.1 R28.1 R29.1 R31.2 R34.2 R35.2 R38.2 R39.2 R40.2 R41.2 R46.2 R47.2 R48.2 TP18.TP U2.9 U3.12
5V0 [5V0]: C1.1 C2.1 C8.1 C17.1 D1.C IC1.1 IC1.6 IC1.7 IC2.3 IC5.3 Q1.5 Q2.2 R1.1 R15.1 TP20.TP
ANT [ANT]: C39.1 L3.1 U1.FEED
ANT1 [ANT]: C40.1 J6.P$3 L3.2 U2.8
BUTTON: J3.52 R41.1 S1.2
CEC: IC4.A2 J2.13 Q5.3
CFG_SEL1: IC6.25 R48.1
CM_1V8 [1V8]: C14.1 J3.183 J3.184 J3.185 J3.186 R18.2
CM_3V3 [3V3]: C15.1 J3.191 J3.192 J3.193 J3.194 R20.2
EMMC_DISABLE_N: J3.2 Q7.3
EN2: C3.1 IC1.12 R1.2
GND: C1.2 C2.2 C3.2 C6.2 C7.2 C8.2 C9.2 C10.1 C11.2 C12.2 C13.2 C14.2 C15.2 C16.2 C17.2 C18.2 C19.2 C20.2 C21.1 C22.1 C23.2 C24.2 C25.2 C26.2 C27.2 C28.2 C29.2 C30.2 C31.2 C32.2 C33.2 C34.2 C35.1 C36.1 C37.2 C38.2 C39.2 C40.2 C41.2 C42.2 D1.A IC1.3 IC1.9 IC1.PAD IC2.1 IC3.5 IC3.10 IC4.B2 IC4.C2 IC5.1 IC6.11 IC6.PAD IC7.1 IC7.2 IC7.3 IC7.4 IC7.EP IC8.1 IC8.4 IC9.1 IC9.2 IC9.3 IC9.4 IC9.EP IC10.2 IC10.3 IC10.5 IC11.4 J1.A4 J1.B4 J2.2 J2.5 J2.8 J2.11 J2.14 J2.17 J2.GND@S1 J2.GND@S2 J2.GND@S3 J2.GND@S4 J3.1 J3.7 J3.13 J3.19 J3.25 J3.26 J3.31 J3.32 J3.37 J3.38 J3.43 J3.44 J3.49 J3.50 J3.55 J3.56 J3.61 J3.62 J3.67 J3.68 J3.73 J3.74 J3.79 J3.80 J3.85 J3.86 J3.91 J3.92 J3.97 J3.98 J3.103 J3.104 J3.109 J3.110 J3.115 J3.116 J3.121 J3.122 J3.127 J3.133 J3.134 J3.139 J3.140 J3.145 J3.146 J3.151 J3.152 J3.157 J3.163 J3.164 J3.169 J3.170 J3.181 J3.182 J3.187 J3.188 J3.195 J3.196 J4.GND J5.GND J5.ID J6.P$1 J6.P$2 JP1.1 JP2.1 JP3.1 Q3.2 Q4.2 Q6.2 Q8.2 R4.2 R5.2 R6.2 R7.2 R8.1 R11.2 R16.2 R22.2 R23.2 R24.2 R25.2 R30.2 R32.1 R33.1 R37.2 S1.1 S1.3 TP25.TP TP26.TP U2.10 U3.13 U3.14 U3.21 U3.22 U4.GND Y1.P$1 Y1.P$3
GPIO2/SDA1: IC10.6 IC11.5 J3.9 JP1.9 R28.2
GPIO3/SCL1: IC10.1 IC11.6 J3.11 JP1.8 R29.2
GPIO4: J3.15 JP1.7
GPIO5: J3.17 JP1.6
GPIO6: J3.21 JP1.5
GPIO7: J3.23 JP1.4
GPIO8: J3.27 JP1.3
GPIO9: J3.29 JP1.2
GPIO10: J3.33 JP2.10
GPIO11: J3.35 JP2.9
GPIO12: J3.45 JP2.8
GPIO13: J3.47 JP2.7
GPIO18: J3.63 JP2.6
GPIO19: J3.65 JP2.5
GPIO20: J3.69 JP2.4
GPIO21: J3.71 JP2.3
GPIO22: J3.75 JP2.2
GPIO46_1V8: J3.88 Q4.3 R13.2
GPIO47_1V8: J3.90 Q6.1 R17.2
H5V0 [H5V0]: C11.1 IC4.A1 IC4.C1 IC5.2 J2.18 Q5.1
HDMI_CEC: J3.171 Q5.2 R14.2
HDMI_CK_N [100R]: J2.12 J3.111
HDMI_CK_P [100R]: J2.10 J3.113
HDMI_D0_N [100R]: J2.9 J3.117
HDMI_D0_P [100R]: J2.7 J3.119
HDMI_D1_N [100R]: J2.6 J3.123
HDMI_D1_P [100R]: J2.4 J3.125
HDMI_D2_N [100R]: J2.3 J3.129
HDMI_D2_P [100R]: J2.1 J3.131
HDMI_HPD: IC4.C3 J2.19 Q4.1
HDMI_SCL: IC4.A3 J2.15 J3.175
HDMI_SDA: IC4.B3 J2.16 J3.173
HM10_KEY: J3.66 R40.1 U3.23
HM10_LED: J3.64 U3.24
HM10_RESET: J3.60 R39.1 U3.11
ID_SC: IC7.6 J3.5 R27.2 TP2.TP
ID_SD: IC7.5 J3.3 R26.2 TP3.TP
ID_WP: IC7.7 R34.1 TP1.TP
IR_IN: IC8.2 J3.54
IR_OUT_NC: J3.48
LOCAL_PWR: IC6.28 R32.2
LX1 [3V3]: IC1.8 L1.1
LX2 [1V8]: IC1.2 L2.1
N$1: R36.1 U1.NC
N$2: J3.28 R23.1
N$3: J3.30 R22.1
N$4: R36.2
N$6: C4.2 IC1.4 R2.2 R5.1
N$7: J3.82 R25.1
N$8: Q1.1 Q1.2 Q1.3 R7.1
N$9: C5.2 IC1.10 R3.2 R4.1
N$10: Q1.4 Q2.1 R6.1
N$11: J3.84 R24.1
N$32: O1.C Q6.3 Q7.2
N$33: O1.A R19.2
N$40: O2.C Q8.3
N$41: O2.A R38.1
NC: IC11.7
P0_1/MODE_PIN_1: JP3.6 U2.17
P0_2/RX: J3.51 U2.2
P0_3/TX: J3.53 U2.3
P0_5/AT_COMMAND: J3.57 U2.20
P2_0/DTR_IN: J3.59 U2.4
P2_1/DD: JP3.4 TP5.TP U2.5
P2_2/DC: JP3.3 TP4.TP U2.6
RBAIS: IC6.35 R37.1
RTC_VBATT: IC11.3 U4.PWR@1 U4.PWR@2
RTC_X1: IC11.1 Y2.1
RTC_X2: IC11.2 Y2.4
RUN: J3.177 Q8.1 R10.1
SRF_!RESET: J3.58 JP3.5 TP7.TP U2.15
SUPERVISOR_!RESET: IC2.2 R9.2 R10.2
UART1_CTS: J3.78 U3.4
UART1_RTS: J3.76 U3.3
UART1_RX: J3.72 U3.1
UART1_TX: J3.70 U3.2
USB251XB_!RESET: C25.1 IC6.26 R31.1 TP24.TP
USB_D1_N [90R]: IC6.1 J1.B2
USB_D1_P [90R]: IC6.2 J1.B3
USB_D2_N: IC6.3
USB_D2_P: IC6.4
USB_D3_N: IC6.6
USB_D3_P: IC6.7
USB_D4_N [90R]: IC6.8 J1.A2
USB_D4_P [90R]: IC6.9 J1.A3
USB_D_N [90R]: IC3.4 J3.167
USB_D_P [90R]: IC3.3 J3.165
USB_D_SHEILD: C36.2 R33.2
USB_ID: J4.ID
USB_OTGID: J3.168 R30.1
USB_SCL: IC6.24 IC9.6 R47.1 TP23.TP
USB_SDA: IC6.22 IC9.5 R46.1 TP22.TP
USB_SEL: IC3.2 Q3.3 R12.1
USB_SHIELD: C10.2 J4.SHIELD J4.SHIELD@0 J4.SHIELD@1 J4.SHIELD@2 J4.SHIELD@3 J4.SHIELD@5 R8.2
USB_WP: IC9.7 R35.1 TP6.TP
USBA_D_N [90R]: IC3.8 IC6.31
USBA_D_P [90R]: IC3.9 IC6.30
USBB_D_N [90R]: IC3.6 J4.D-
USBB_D_P [90R]: IC3.7 J4.D+
VBAT [3V3]: C16.1 J3.197 J3.198 J3.199 J3.200 R21.2
VBUSA: C12.1 C13.1 J1.A1 J1.B1 R15.2
VBUSB: J4.VBUS Q3.1 Q7.1 R11.1 R16.1
VC_TCK: J3.180
VC_TDI: J3.174
VC_TDO: J3.178
VC_TMS: J3.176
VC_TSRT_N: J3.172
VDAC: J3.189 J3.190
VDD_CORRE: J3.179
VDDA18CR: C24.1 IC6.14
VDDA18PLL: C23.1 IC6.34
VIN [5V0]: F1.1 J5.VBUS
VIN_FUSED [5V0]: C18.1 F1.2 Q1.6 Q2.3 TP21.TP
XTALIN: C21.2 IC6.33 Y1.P$2
XTALOUT: C22.2 IC6.32 Y1.P$4